# Altium PCB OSC.PcbDoc
Units mm, origin at the board's own origin, x right, y up, seen from the top; angles counter-clockwise.
Board outline 80 x 100 mm, 2 copper layers (Top Layer, Bottom Layer); 35 components, 22 nets, 70 pads, 0 vias.
Unrouted connection lines stored in the file: 46.
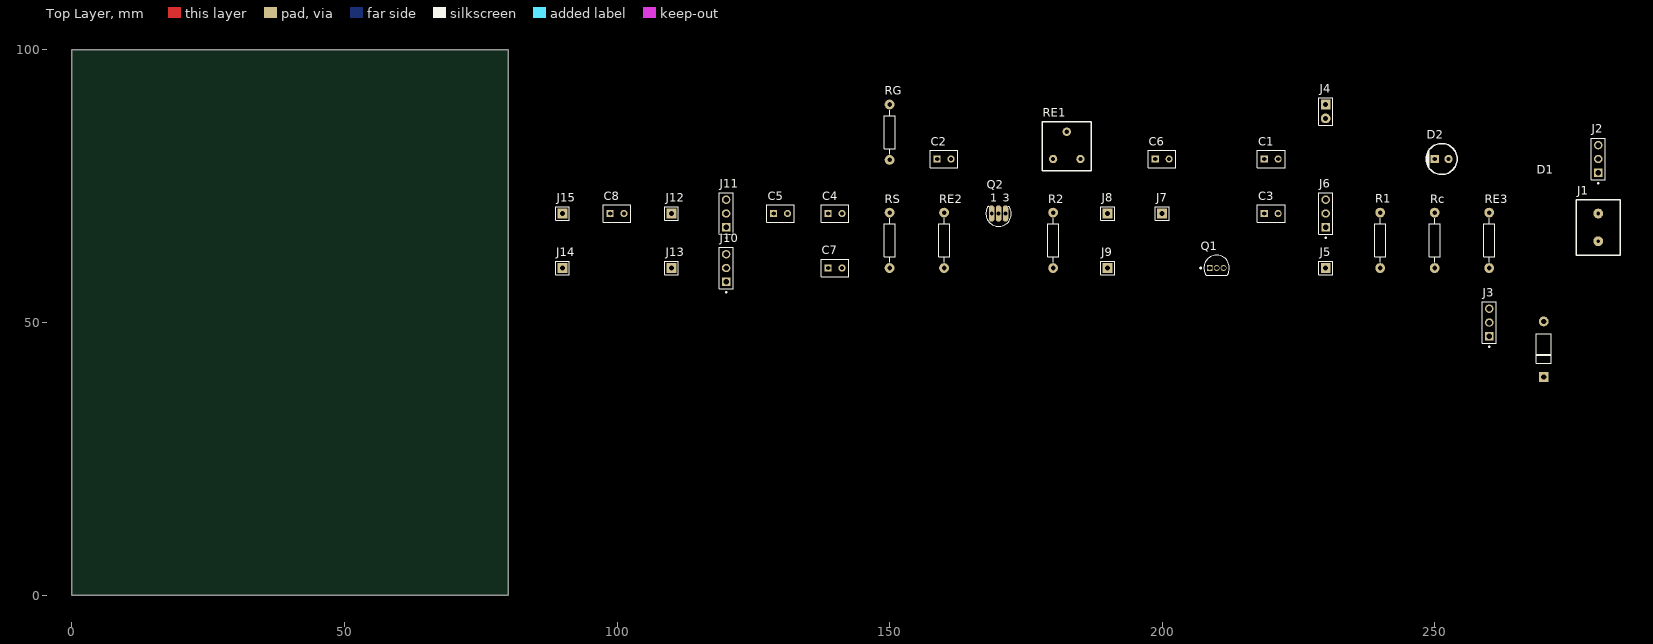
[diagram p0: Top Layer view]
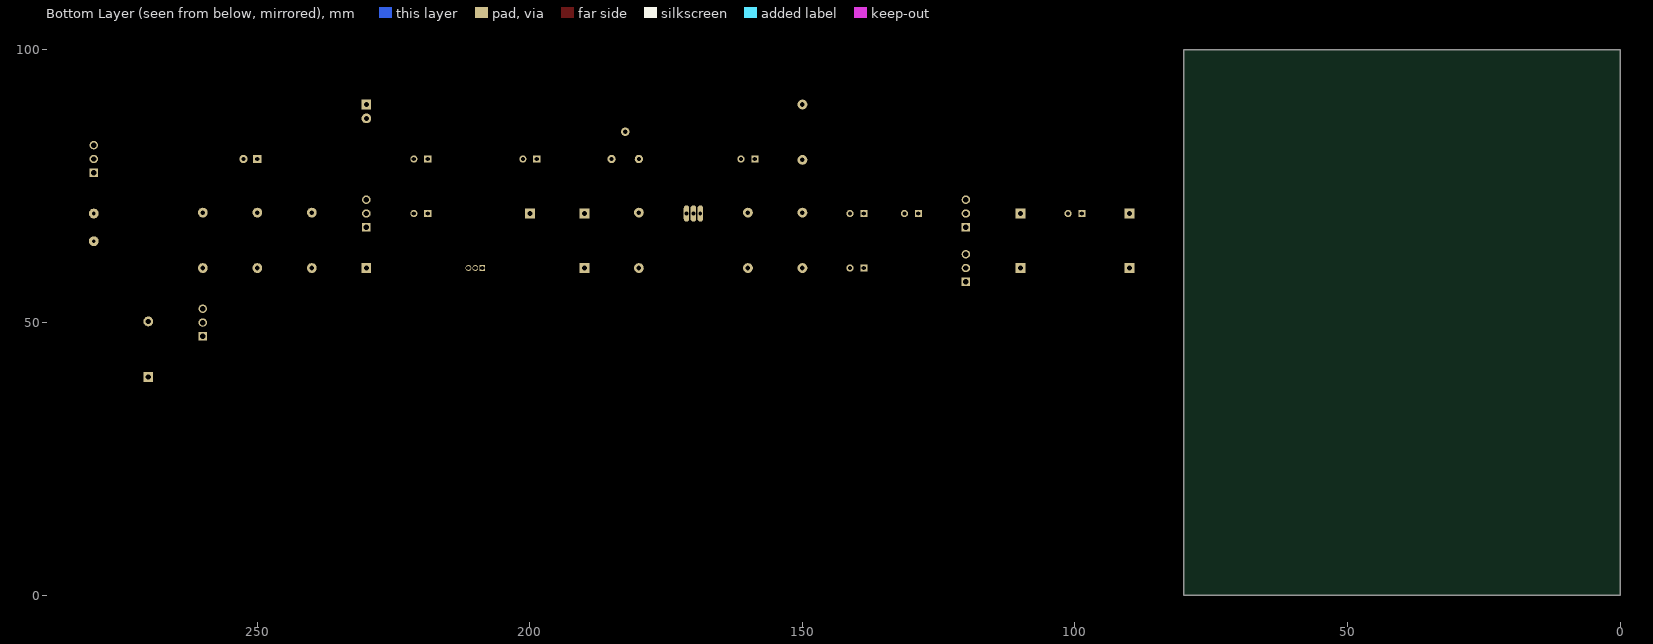
[diagram p1: Bottom Layer view, seen from below]

## Layer stack, top to bottom
Top Solder: solder mask 0.0102, Solder Resist, Dk 3.5
Top Layer: signal copper 0.0356
Dielectric 1: dielectric 0.32, FR-4, Dk 4.8
Bottom Layer: signal copper 0.0356
Bottom Solder: solder mask 0.0102, Solder Resist, Dk 3.5

## Board outline
0,0 0,100 80,100 80,0

## Design rules (kind name [scope] priority, off if disabled: settings)
Clearance [All] p1: gap=0.254 ignorepadtopadclearanceinfootprint=TRUE
ComponentClearance [All] p1: gap=0 collisioncheckmode=3 verticalgap=0 showdistances=FALSE
PolygonConnect [All] p1: connectstyle=Relief reliefconductorwidth=0.254 reliefentries=4 polygonreliefangle="90 Angle" airgapwidth=0.254
RoutingVias [All] p1: holewidth=0.711 width=1.27 viastyle="Through Hole" minholewidth=0.711 minwidth=1.27 maxholewidth=0.711 maxwidth=1.27
SolderMaskExpansion [All] p1: expansion=0.102 istentingtop=FALSE
SupplyNets "Schematic Supply Nets_1" [InNet('GND')] p1: voltage=0.000
SupplyNets "Schematic Supply Nets" [InNet('+12')] p2: voltage=0.000
Width [All] p1: maxlimit=0.254 minlimit=0.254 preferedwidth=0.254
29 further rules are at their usual default settings.

## Components (designator, comment, footprint, x,y, rotation, side; value= is the part's Value field where it differs from the comment)
C1 "0.1uF" CAPR51-254-508X318X736 220,80 r0 top
C2 "0.1uF" CAPR51-254-508X318X736 160,80 r0 top
C3 "0.1uF" CAPR51-254-508X318X736 220,70 r0 top
C4 "1uF" CAPR51-254-508X318X736 140,70 r0 top
C5 "0.01uF" CAPR51-254-508X318X736 130,70 r0 top
C6 "1000uF" CAPR51-254-508X318X736 200,80 r0 top
C7 "0.01uF" CAPR51-254-508X318X736 140,60 r0 top
C8 "1uF" CAPR51-254-508X318X736 100,70 r0 top
D1 "Diode 1N4001" DO-41 270,40 r90 top
D2 "LED" LED 250,80 r0 top
J1 "VCC+12V" HDR_1X2_TE 280,70 r0 top
J2 "90120-0763" FP-90120-0763-MFG 280,80 r90 top
J3 "90120-0763" FP-90120-0763-MFG 260,50 r90 top
J4 "Vout" HDR_1x2_pin 230,90 r90 top
J5 "TestPin" HDR_1x1_pin 230,60 r0 top
J6 "90120-0763" FP-90120-0763-MFG 230,70 r90 top
J7 "TestPin" HDR_1x1_pin 200,70 r0 top
J8 "TestPin" HDR_1x1_pin 190,70 r0 top
J9 "TestPin" HDR_1x1_pin 190,60 r0 top
J10 "90120-0763" FP-90120-0763-MFG 120,60 r90 top
J11 "90120-0763" FP-90120-0763-MFG 120,70 r90 top
J12 "TestPin" HDR_1x1_pin 110,70 r0 top
J13 "TestPin" HDR_1x1_pin 110,60 r0 top
J14 "TestPin" HDR_1x1_pin 90,60 r0 top
J15 "TestPin" HDR_1x1_pin 90,70 r0 top
Q1 "2N3904" ONSC-TO-92-3-29-11 210,60 r0 top
Q2 "2N5458" 2N5458 170,70 r0 top
R1 "10k" Resistor 240,60 r90 top
R2 "3k3" Resistor 180,60 r90 top
Rc "2.7k" Resistor 250,60 r90 top
RE1 "Rpot100ohm" Potentiometer 180,80 r0 top
RE2 "1k" Resistor 160,60 r90 top
RE3 "1k" Resistor 260,60 r90 top
RG "10M" Resistor 150,79.84 r90 top
RS "2k7" Resistor 150,60 r90 top

## Footprints (in the part's own frame and the unit in brackets; to place one, negate y for a bottom-side part, rotate by r counter-clockwise, add the part's x,y. Pads: shape width x height; smd on the part's side, far side on the other; paste and mask are expansions set on the pad)
2N5458 [mm] "Jfet"
  oval 1x3 hole 0.7: 1(-1.27,0) 2(0,0) 3(1.27,0)
  silkscreen extent -2.34,-2.34 2.34,1.35
CAPR51-254-508X318X736 [mm] "THD, 2-Leads, Body 5.08x3.18mm"
  rect 1.3x1.3 hole 0.8: 1(-1.27,0)
  round 1.3 hole 0.8: 2(1.27,0)
  silkscreen extent -2.54,-1.59 2.54,1.59, body extent -2.54,-1.59 2.54,1.59, height 7.36
DO-41 [mm]
  round 1.8 hole 0.94: A(10.2,0)
  rect 1.8x1.8 hole 0.94: K(0,0)
  silkscreen extent 2.5,-1.4 7.9,1.4, body extent -25.92,-1.3 36.58,1.3, height 2.7
FP-90120-0763-MFG [mm]
  rect 1.55x1.55 hole 1 paste-2539.97 mask+0: 1(-2.54,0)
  round 1.55 hole 1 paste-2539.97 mask+0: 2(0,0) 3(2.54,0)
  silkscreen extent -4.57,-1.27 3.81,1.27, body extent -3.91,-1.37 3.91,1.37, height 0.25
HDR_1x1_pin [mm]
  rect 1.8x1.8 hole 0.9: 1(0,0)
  silkscreen extent -1.27,-1.27 1.27,1.27
HDR_1x2_pin [mm]
  rect 1.8x1.8 hole 0.9: 1(0,0)
  round 1.8 hole 0.9: 2(-2.54,0)
  silkscreen extent -3.81,-1.27 1.27,1.27
HDR_1X2_TE [mm] "282836-2"
  round 1.8 hole 0.7: 1(0,0) 2(0,-5.08)
  silkscreen extent -4,-7.62 4,2.54
LED [mil]
  rect 60x60 hole 30: 1(0,0)
  round 60 hole 30: 2(100,0)
  silkscreen extent -62,-112 162,112
ONSC-TO-92-3-29-11 [mm] "TO, 3-Leads, Body Dia 4.7mm, Pitch 1.27mm"
  rect 1.05x1.05 hole 0.8: 1(-1.27,0)
  round 1.05 hole 0.8: 2(0,0) 3(1.27,0)
  silkscreen extent -3.07,-1.34 2.35,2.35, body extent -2.35,-1.33 2.36,2.36, height 7.87
Potentiometer [mil]
  round 60 hole 30: 1(0,0) 2(98.43,196.85) 3(196.85,0)
  silkscreen extent -79,-85 275,269
Resistor [mm] "Res_2mm_AxialTH"
  round 1.8 hole 0.85: 1(0,0) 2(10.16,0)
  silkscreen extent 1.02,-1.02 9.14,1.02

## Part data
C1 C2 C3 C4 C5 C6 C7 C8: library part CMP-1664-00004-1, "Radial Leaded Multilayer Ceramic Capacitor, 0.1 uF, +/- 10%, 50 V, -55 to 125 degC, 2-Pin THD, RoHS, Tape and Reel", Case\Package=SOT-23-5, Dropout Voltage="260 mV", Max Input Voltage="8 V", Max Operating Temperature="85 degC", Max Power Dissipation="250 mW", Min Operating Temperature="-40 degC", Output Current="150 mA", Output Voltage="5 V", Package Quantity=3000, ComponentLink1Description="Manufacturer URL", ComponentLink1URL=http://www.kemet.com/, ComponentLink2Description=Datasheet, ComponentLink2URL=http://www.kemet.com/docfinder?Partnumber=C320C104K5R5TA, DatasheetVersion=Dec-15, Height="1.3 mm", Length="3 mm", Mount="Surface Mount", Outputs=1, PackageDescription="2-Pin Through Hole Device, Body 5.08 x 3.18 mm, Pitch 2.54 mm", PackageReference=CAPR51-254-508X318X736, Packaging="Tape and Reel", Pins=5, Radiation Hardening=No, RoHSCompliant=true, Width="1.8 mm"
D1: "1 Amp General Purpose Rectifier", Code_JEDEC=DO-204-AL, ComponentLink1Description="Manufacturer Link", ComponentLink1URL=http://www.fairchildsemi.com/, ComponentLink2Description=Datasheet, ComponentLink2URL=http://www.fairchildsemi.com/ds/1N%2F1N4001.pdf, DatasheetVersion=1998, LatestRevisionDate=17-Jul-2002, LatestRevisionNote="Re-released for DXP Platform.", PackageDescription="Diode, Axial; Body 5.2 x 2.7 mm (LxDia. max), Lead Dia. 0.86 mm (max)", PackageReference=DO-41, PackageVersion=Aug-1999, Published=8-Jun-2000, Publisher="Altium Limited"
J1: library part CON_1x2, "Connector, 2-Ports"
J2 J3 J6 J10 J11: library part CMP-04776-000084-1, "CONN HEADER VERT 3POS 2.54MM", Current Rating=3A, Manufacturer=Molex, Temperature="-55°C to +125°C", Temperature Range High=+125°C, Temperature Range Low=-55°C, Voltage Rating=350V, Automotive=No, Category=Conn, ComponentLink2Description=Datasheet, ComponentLink2URL=https://www.molex.com/webdocs/datasheets/pdf/en-us/0901200763_PCB_HEADERS.pdf, Conn Gender=Male, Conn Orientation=Vertical, Contact Material=Gold,Nickel, Device Class L1=Connectors, Device Class L2="Headers and Wire Housings", Device Class L3=unset, Digikey Description="CONN HEADER VERT 3POS 2.54MM", Footprint Url=https://www.molex.com/pdm_docs/sd/901200763_sd.pdf, Height=5.8mm, Lead Free=Yes, Manufacturer Part Number=90120-0763, Mouser Description="Board-To-Board Connector, C-Grid III 90120 Series, Through Hole, Header, 3, 2.54 mm", Number Of Contacts=3, Number Of Rows=1, Octopart=https://octopart.com/90120-0763-molex-655433, Package=90120-0763, Pitch=2.54mm, RoHS=TRUE
J4: library part HDR_1x2, "Header, 2-Pin"
J5 J7 J8 J9 J12 J13 J14 J15: library part "Test Pin"
Q1: library part CMP-2000-05562-1, "General Purpose Transistor, NPN Silicon, 200 mA, 60 V, -55 to 150 degC, 3-Pin TO-92, RoHS, Bulk", Collector- Base Voltage VCBO=60V, Collector- Emitter Voltage VCEO Max=40V, Collector-Emitter Saturation Voltage=0.3V, Emitter- Base Voltage VEBO=6V, Manufacturer=ONSemiconductor, Maximum DC Collector Current=0.2A, Maximum Operating Temperature=+150C, Maximum Power Dissipation=625mW, Minimum Operating Temperature=-65C, Package / Case=TO-92-3(TO-226), Package Description="3-Pin Transistor Outline, Body 4.825 x 3.685 mm, Pitch 1.27 mm", Package Reference=TO-92-3-29-11, Brand=ONSemiconductor, Configuration=Single, Datasheet URL=https://datasheet.ciiva.com/4725/2n3903-d-285841-4725808.pdf, Datasheet Version="Rev. 8, 08/2012", DC Collector/Base Gain hfe Min=60, Factory Pack Quantity=5000, Gain Bandwidth Product fT=270MHz, Manufacturer URL=http://www.onsemi.com/, Mounting Style=ThroughHole, Mounting Technology=ThroughHole, Packaging=Bulk, Product Category=BipolarTransistors-BJT, RoHS=Details, Transistor Polarity=NPN
Q2: library part "JFET N 2N5458"
R1 R2 Rc RE2 RE3 RG RS: library part "Resistor 0.25W 5mm", "0.25W,Axial"
RE1: library part Rpot

## Nets (pads, with @x,y where several pads share a name; then routed paths per layer and width w, separated by ;. In a path a pad name is that pad's centre, name@x,y a point inside that pad or via, vN(x,y) a via of type N, cw(c..) or ccw(c..) an arc to the next point about the centre after c; other vN are vias at no path point)
+12: C6.2 J2.1
GND: C2.1 C4.1 C5.2 C7.1 D2.1 J1.2 J4.1 R2.1 RE2.1 RG.1 RS.1
NetC1_1: C1.1 J9.1 Q1.2 R1.1 R2.2
NetC1_2: C1.2 J6.2
NetC2_2: C2.2 RE1.2 RE1.3 RE2.2
NetC3_1: C3.1 J11.2
NetC3_2: C3.2 J4.2 J5.1 Q1.3 Rc.1
NetC4_2: C4.2 J11.1 J12.1
NetC5_1: C5.1 J10.1 J13.1
NetC6_1: C6.1 J8.1 Q2.3
NetC7_2: C7.2 Q2.2 RS.2
NetC8_1: C8.1 J10.3 J14.1
NetC8_2: C8.2 J11.3 J15.1
NetD1_1: J1.1
NetD1_2: J2.2 RE3.2
NetD2_2: D2.2 RE3.1
NetJ2_3: J2.3 R1.2 Rc.2
NetJ3_2: J3.2
NetJ6_3: J6.3 J10.2
NetJ7_1: J7.1 Q1.1 RE1.1
OSC1: J3.3 J6.1
OSC2: J3.1 Q2.1 RG.2
pads on no net: D1.A D1.K

## Silkscreen, mask and mechanical layers (free items; w line width, h text height)
Mechanical 1:
  the board outline again, w0.254

## Text inside footprints (layer, text, board x,y; h text height)
Q2: Top Overlay "1" at 168.476,72.159 h1.5; Top Overlay "3" at 170.762,72.159 h1.5